# Altium PCB Flomio BLE-NFC.PcbDoc (part 2 of 2)
Units mil, origin at the board's own origin, x right, y up, seen from the top; angles counter-clockwise.
Board outline 3543.31 x 3543.31 mil, 2 copper layers (Top Layer, Bottom Layer), stack 61.2 mil thick; 153 components, 99 nets, 427 pads, 266 vias.
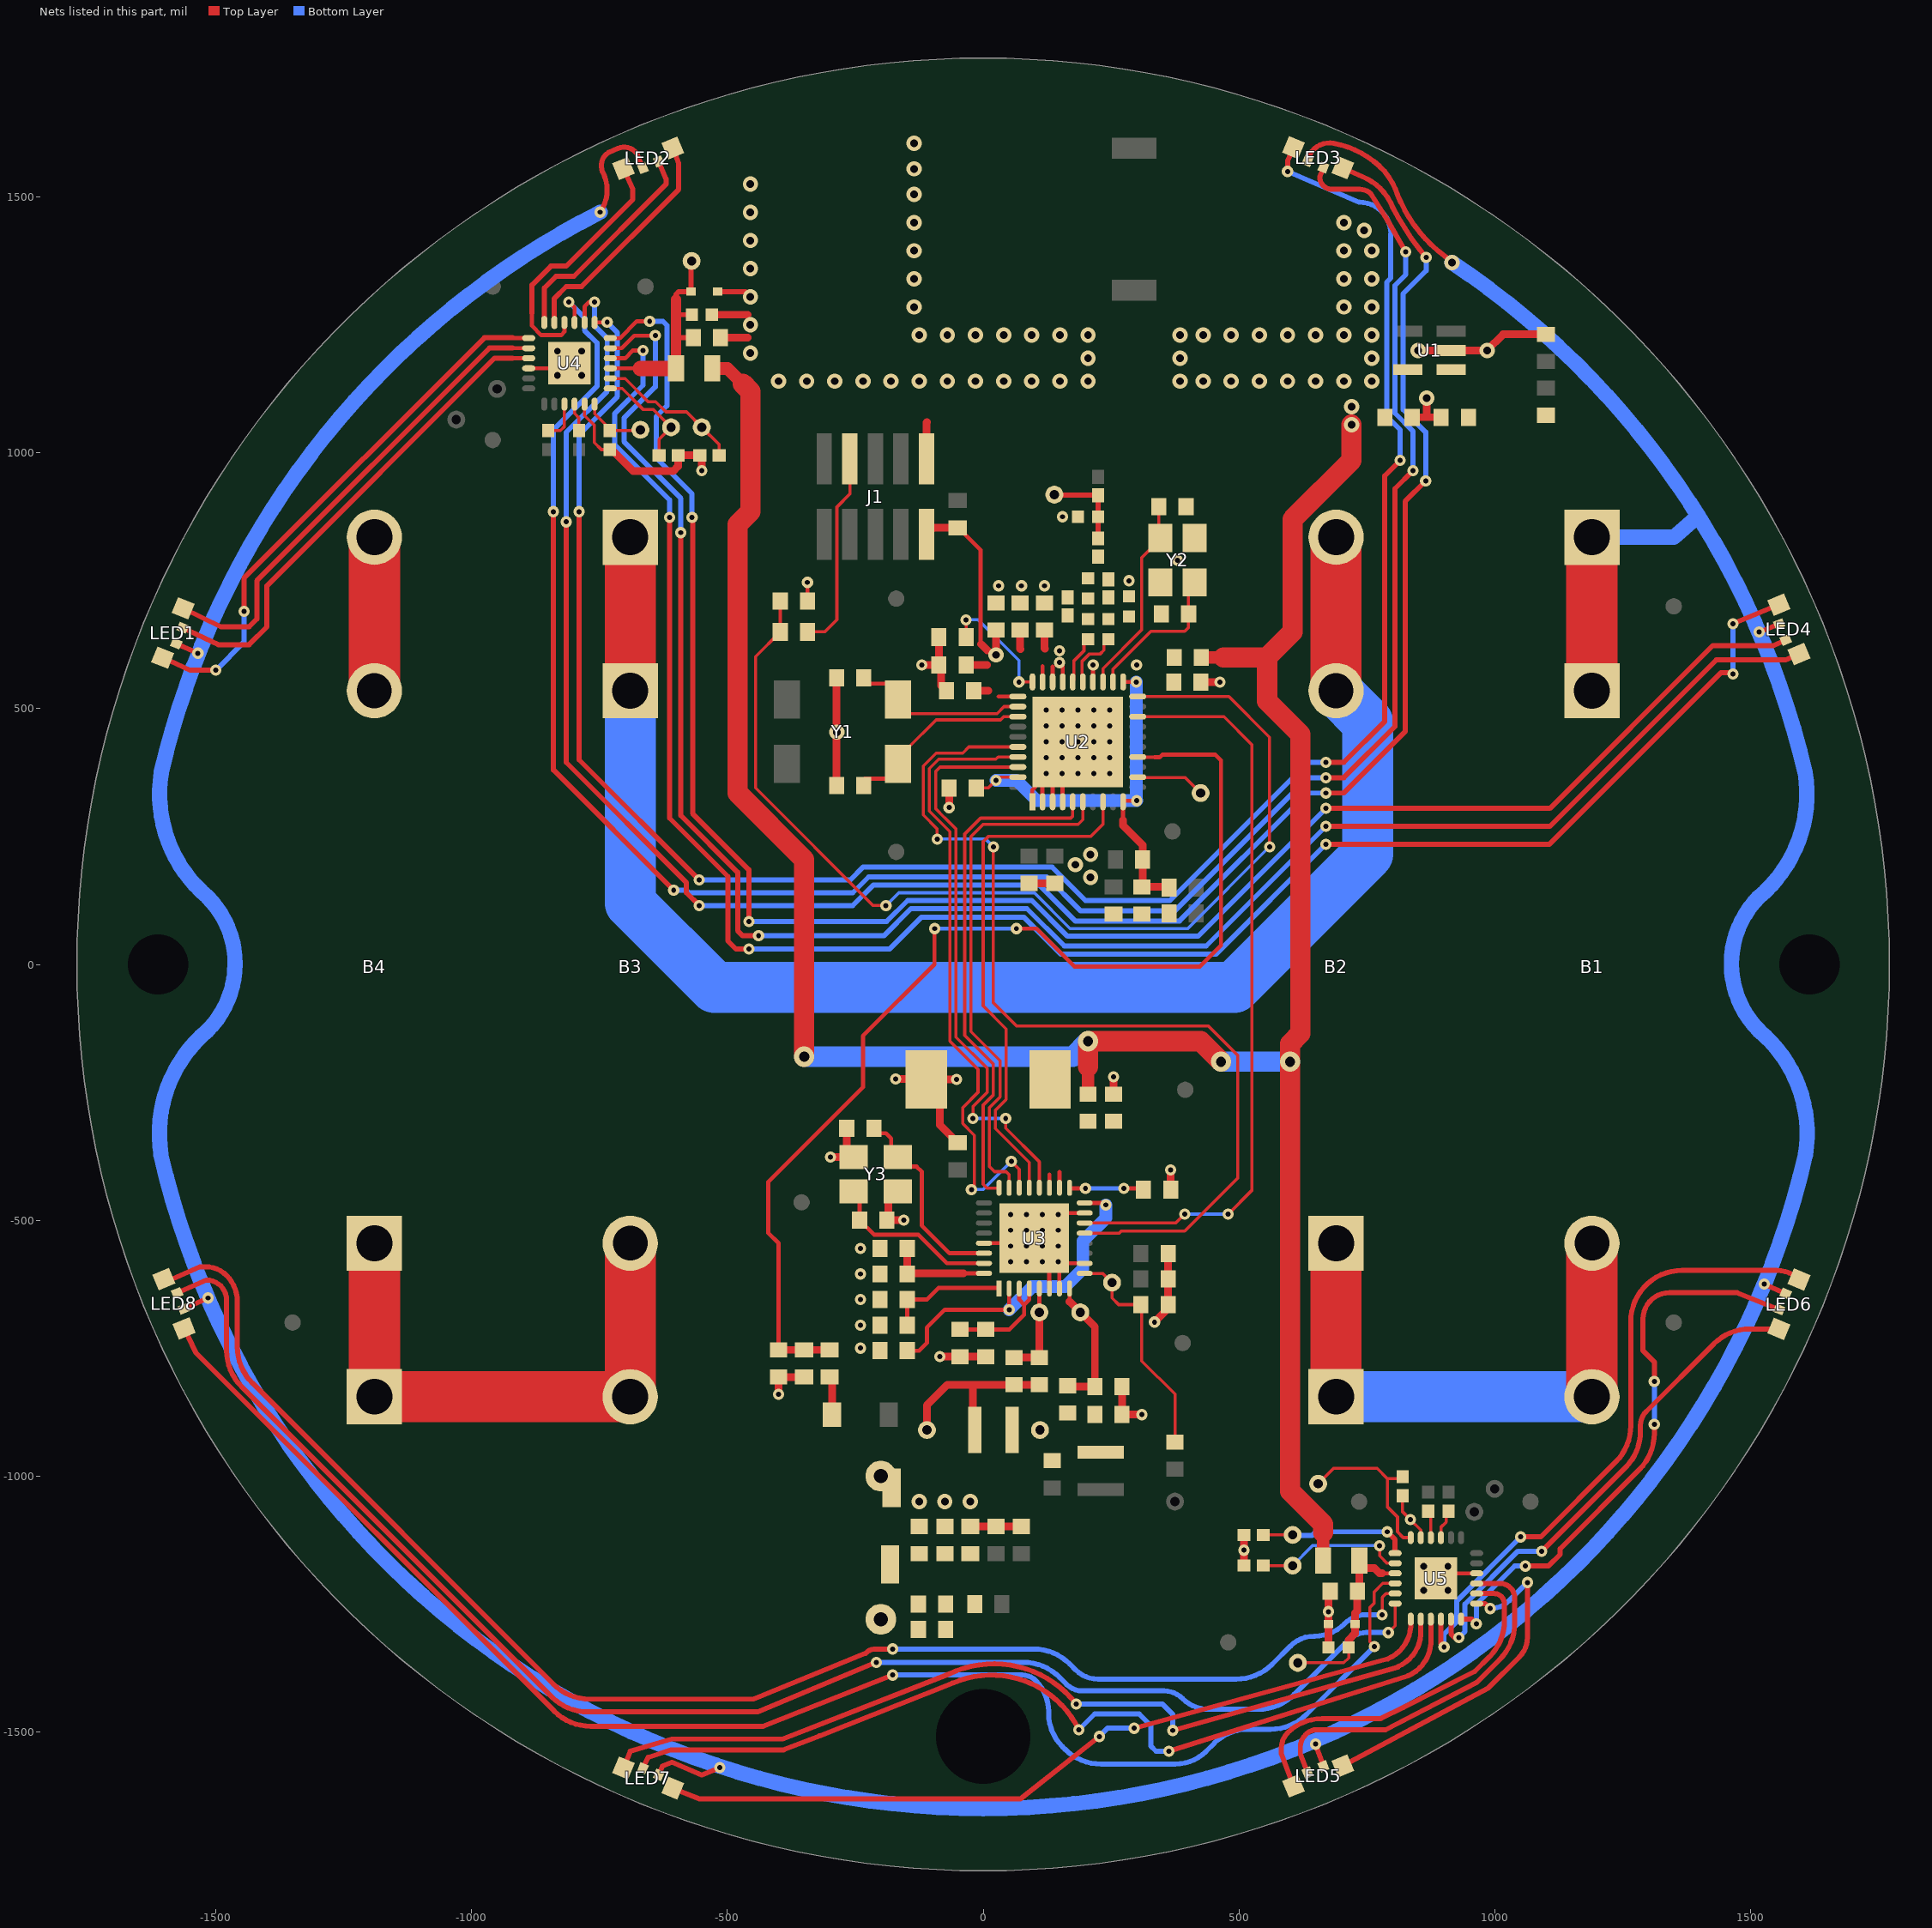
[diagram p2: the nets of this part, all layers, seen from the top]

## Via types
v1: diameter 22, hole 10, Top Layer to Bottom Layer, tented both sides, 138 vias
v2: diameter 30, hole 15, Top Layer to Bottom Layer, tented both sides, 74 vias
v3: diameter 20, hole 10, Top Layer to Bottom Layer, 41 vias
v4: diameter 25.98, hole 12.99, Top Layer to Bottom Layer, tented top, 8 vias
v5: diameter 40, hole 20, Top Layer to Bottom Layer, tented both sides, 4 vias
v6: diameter 22, hole 10, Top Layer to Bottom Layer, 1 vias

## Nets (pads, with @x,y where several pads share a name; then routed paths per layer and width w, separated by ;. In a path a pad name is that pad's centre, name@x,y a point inside that pad or via, vN(x,y) a via of type N, cw(c..) or ccw(c..) an arc to the next point about the centre after c; other vN are vias at no path point) (continued)
GND: B4.2 C1.2 C2.2 C3.2 C4.2 C5.2 C6.2 C7.2 C8.2 C9.2 C10.2 C11.2 C12.2 C13.2 C14.2 C15.2 C16.2 C17.2 C18.2 C19.2 C20.2 C21.2 C22.2 C23.2 C24.1 C25.1 C26.2 C27.2 C31.1 C32.1 C33.1 C34.1 C35.2 C36.2 C44.2 C45.2 C46.2 C47.2 C48.2 C49.2 C50.2 C51.2 C52.2 C53.2 D2.1 D3.1 E3.1 J1.1 L1.1 L7.2 R2.2 R7.2 R8.2 R10.2 R11.2 R12.2 R13.2 R15.2 R18.2 R19.2 R20.2 R23.2 R24.2 R25.2 TP22.1 U1.2 U2.1 U2.2 U2.3 U2.4 U2.41 U3.6 U3.7 U3.10 U3.15 U3.29 U3.33 U4.10 U4.17 U4.25 U5.10 U5.17 U5.25 Y2.2 Y2.4 Y3.2 Y3.4 | length 3727.9
  Top Layer w6: U4.17@-779.17,1095.28 -779.17,1073.18 -760,1054 -760,1020 -746.3,1006.3 R18.2@-720,1006.3 ; R23.2@820,-1038.7 820,-1070 v6(834.97,-1084.97) 855.47,-1105.47 U5.17@855.47,-1120.28
  Top Layer w8: U4.10@-888.43,1165.16 -818.54,1165.16 U4.25@-808.7,1175 U4.25@-779.17,1145.47 ; C26.2@-343.43,710 v1@-343.43,753.43 ; U3.29@2.33,-544.62 U3.33@32.94,-544.62 ; U2.1@96,313 96,317.46 U2.1@96.42,317.87 ; U2.1@96.19,317.65 96.19,341.19 U2.41@102,347 ; U2.2@115.88,317.65 U2.41@115.88,348.26 ; U3.6@129.3,-632.67 U3.33@129.3,-602.06 ; U2.3@135.79,317.87 U2.41@135.79,348.48 ; U3.7@148.99,-632.67 U3.33@148.99,-602.06 ; U2.4@155.25,317.65 U2.41@155.25,348.26 ; U3.33@166.83,-584.22 197.44,-584.22 U3.10@197.22,-584 ; U3.33@167.06,-486 U3.15@197.67,-486 ; U5.25@855.47,-1170.47 U5.25@885,-1200 894.84,-1190.16 U5.10@964.72,-1190.16
  Top Layer w10: D2.1@-519.02,1315 -465,1315 v2(-455,1305)
  Top Layer w15: R18.2@-726.3,1006.3 -684,964 -606,964 -596.3,973.7 R19.2@-596.3,995 R20.2@-553.7,995 -550,991.3 v1(-550,965) ; C51.2@-530.31,1270 -460,1270 ; C50.2@-513.43,1225 -460,1225 ; v1(-400,-840) C27.2@-400,-806.57 R11.2@-350,-806.57 ; v1(-298.46,-376.54) Y3.4@-253.31,-376.54 -266.57,-363.27 C35.2@-266.57,-320 ; C25.1@-286.57,350 C24.1@-286.57,560 ; v1(-171,-224) -112.06,-224 C13.2@-111.06,-225 ; Y3.2@-166.69,-443.46 -185,-461.77 -185,-496.57 C36.2@-188.43,-500 v1(-155,-500) ; v1(-120,585) C3.2@-86.57,585 ; C13.2@-111.06,-191.06 C13.2@-110,-190 ; J1.1@-110.7,987.92 -110.7,1059.3 -110,1060 ; R10.2@-86.57,640 C3.2@-86.57,585 ; v1(-85,-766.57) C21.2@5,-766.57 ; C10.2@-71.57,535 -82,545.43 -82,580.43 C3.2@-86.57,585 ; v1(-66.57,306.57) C4.2@-66.57,345 ; v1(-52.13,-225) C13.2@-111.06,-225 ; R12.2@-50,-348.43 -85,-313.43 -85,-251.06 C13.2@-111.06,-225 ; R15.2@-25,-1098.43 C46.2@25,-1098.43 C45.2@75,-1098.43 ; C12.2@90,158.43 C11.2@140,158.43 ; C15.2@255,-253.43 v1(255,-220) ; C48.2@271.57,-825 C44.2@271.57,-880 v1(310,-880) ; v1(335,-699) 361.57,-672.43 C49.2@361.57,-665 C22.2@361.57,-615 C23.2@361.57,-565 ; Y2.4@346.54,756.54 Y2.4@346.54,746.69 Y2.4@348.43,744.8 ; R13.2@366.57,-440 v1(366.57,-401.57) ; C32.1@396.57,895 C32.1@400,891.57 ; Y2.2@400,846.77 Y2.2@413.46,833.31 Y2.2@413.46,823.46 ; C6.2@425.57,552 v1(463,552) ; R25.2@510,-1175 R24.2@510,-1115 ; C53.2@675.31,-1335 D3.1@675,-1289.02 v1(675,-1265) 675,-1228.43 C52.2@678.43,-1225 ; C2.2@838.58,1069.53 867.01,1069.53 ; v2(850,1200) U1.2@915,1200 v2(985,1200) 1016.57,1231.57 R2.2@1100,1231.57 ; v2(867.01,1107.01) 867.01,1069.53 ; C1.2@895.43,1069.53 867.01,1069.53
  Top Layer w100: B4.2@-1190,535 B4.2@-1190,835
  other v1: 510,-1145 -240,-750 -240,-705 -240,-655 -240,-605 -240,-555 30,740 75,740 120,740 -343.43,746.71 285,750 380,790 155,875
  other v2: -125,-1050 -75,-1050 -25,-1050 210,170 180,195 210,215 -286,454 -400,1140 -345,1140 -290,1140 -235,1140 -180,1140 -125,1140 -70,1140 -15,1140 40,1140 95,1140 150,1140 205,1140 385,1140 430,1140 485,1140 540,1140 595,1140 650,1140 705,1140 760,1140 205,1185 385,1185 760,1185 -455,1195 -125,1230 -70,1230 -15,1230 40,1230 95,1230 150,1230 205,1230 385,1230 430,1230 485,1230 540,1230 595,1230 650,1230 705,1230 760,1230 -455,1250 -135,1285 705,1285 760,1285 -135,1340 705,1340 760,1340 -455,1360 -135,1395 705,1395 760,1395 -455,1415 745,1435 -135,1450 705,1450 -455,1470 -135,1505 -455,1525 -135,1555 -135,1605
  other v3: 53.5,-581.5 84.5,-581.5 115.5,-581.5 146.5,-581.5 53.5,-550.5 84.5,-550.5 115.5,-550.5 146.5,-550.5 53.5,-519.5 84.5,-519.5 115.5,-519.5 146.5,-519.5 53.5,-488.5 84.5,-488.5 115.5,-488.5 146.5,-488.5 123,373 154,373 185,373 216,373 247,373 123,404 154,404 185,404 216,404 247,404 123,435 154,435 185,435 216,435 247,435 123,466 154,466 185,466 216,466 247,466 123,497 154,497 185,497 216,497 247,497
  other v4: 861.38,-1223.62 908.62,-1223.62 861.38,-1176.38 908.62,-1176.38 -832.32,1151.38 -785.08,1151.38 -832.32,1198.62 -785.08,1198.62
GPIO1: U2.38 U3.20 | length 1123.9
  Top Layer w6: v1(-20,-301) -20,-278.03 8,-250.03 8,-203 -53,-142 -53,264.97 -74.6,286.57 -74.86,286.57 -93,304.72 -93,377 -84.23,385.78 U2.38@67.87,385.78 ; v1(44,-301) 44,-320 109.84,-385.84 U3.20@109.84,-437.56
  Bottom Layer w6: v1(-20,-301) v1(44,-301)
GPIO2: U2.37 U3.22 | length 1228.7
  Top Layer w6: v1(-23,-440) -17,-434 -17,-334 -40,-311 -40,-280 -10,-250 -10,-205 -65,-150 -65,259.75 -105,299.75 -105,383 -87,401 25,401 29.47,405.47 U2.37@67.87,405.47 ; v1(55,-385) 70.47,-400.47 U3.22@70.47,-437.56
  Bottom Layer w6: v1(-23,-440) 0,-440 v1(55,-385)
I/O_0: R13.1 U3.17 | length 145.1
  Top Layer w8: U3.17@168.9,-437.56 v1(200,-437.56) ; v1@275.46,-437.56 310.98,-437.56 R13.1@313.43,-440
  Bottom Layer w8: v1(200,-437.56) v1(275,-437.56)
IRQ: U2.36 U3.13 | length 1880.7
  Top Layer w6: v1(-90,245) -90,265 -117,292 -117,387.97 -91.97,413 -40,413 -27.85,425.15 U2.36@67.87,425.15 ; v1(20,230) 20,-75 65,-120 440,-120 498,-178 498,-417.03 394.03,-521 270,-521 265.85,-525.15 U3.13@197.44,-525.15
  Bottom Layer w6: v1(-90,245) 5,245 v1(20,230)
MISO: U2.6 U3.23 | length 1016.8
  Top Layer w6: U3.23@50.79,-437.56 50.79,-410.79 45,-405 22,-405 12,-395 12,-280 33,-259 33,-188 -24,-131 -24,249.94 0.06,274 185.97,274 194.84,282.87 U2.6@194.84,317.87
MOD: U2.18 U3.14 | length 1471.2
  Top Layer w6: U3.14@197.44,-505.46 376.53,-505.46 v1(394,-488) ; U2.18@302.13,484.23 470.77,484.23 525,430 525,-442 v1(479,-488)
  Bottom Layer w6: v1(394,-488) v1(479,-488)
MOSI: U2.5 U3.24 | length 1004.2
  Top Layer w6: U3.24@31.1,-437.56 7.56,-437.56 0,-430 0,-275 20,-255 20,-195 -36,-139 -36,254.91 -4.91,286 171.16,286 175.16,290 U2.5@175.16,317.87
NetB1_2: B1.2 B2.1 | length 1100
  Top Layer w100: B2.1@690,-845 B2.1@690,-545 ; B1.2@1190,-845 B1.2@1190,-545
  Bottom Layer w100: B2.1@690,-845 B1.2@1190,-845
NetB2_2: B2.2 B3.1 | length 2978.1
  Top Layer w100: B3.1@-690,535 B3.1@-690,835 ; B2.2@690,535 B2.2@690,835
  Bottom Layer w100: B3.1@-690,535 -690,120 -525,-45 491,-45 752,216 752,473 B2.2@690,535
NetB3_2: B3.2 B4.1 | length 1100
  Top Layer w100: B4.1@-1190,-545 B4.1@-1190,-845 B3.2@-690,-845 B3.2@-690,-545
NetC28_2: C28.2 C29.1 L1.2
NetC29_2: C29.2 L2.1 L4.2
NetC30_2: C30.2 C33.2 L4.1
NetC34_2: C34.2 L2.2 L3.1 TP2.1 | length 171.1
  Top Layer w10: TP2.1@139.1,918.3 140.12,917.28 L3.1@225,917.28 225,875.31 C34.2@224.69,875 224.69,833.03 L2.2@225,832.72
NetC37_1: C37.1 C42.1 C44.1 L5.2 L6.1 TP5.1
NetC38_2: C38.2 C40.2 L5.1 TP4.1 | length 374.9
  Top Layer w15: TP4.1@-110,-910 -110,-861.57 -70,-821.57 C40.2@60,-821.57 C38.2@110,-821.57 ; -20,-821.57 -20,-906.42 L5.1@-16.42,-910
NetC39_1: C39.1 C41.1 R14.2
NetC39_2: C39.2 C41.2 C47.1 E2.1 L7.1 R15.1 TP21.1
NetD1_2: D1.2 R9.1 | length 75.3
  Top Layer w15: R9.1@-300,-806.57 -295.5,-811.07 D1.2@-295.5,-880
NetJ1_7: J1.7 R6.1 | length 391.8
  Top Layer w6: R6.1@-343.43,650 -310,650 -286,674 -286,894 -260.7,919.3 J1.7@-260.7,987.92
NetR16_1: R16.1 U4.16 | length 55.2
  Top Layer w6: U4.16@-798.86,1095.28 -798.86,1076.86 -790,1068 R16.1@-790,1043.7
NetR17_1: R17.1 U4.15 | length 78.5
  Top Layer w6: R17.1@-850,1043.7 -826.3,1043.7 -818.54,1051.46 U4.15@-818.54,1095.28
NetR18_1: R18.1 TP11.1 U4.18 | length 121.4
  Top Layer w6: U4.18@-759.49,1095.28 -759.49,1076.49 -730,1047 R18.1@-730,1043.7 ; R18.1@-725,1048.7 -720,1043.7 -671.3,1043.7 TP11.1@-670,1045
NetR19_1: R19.1 TP12.1 U4.19 | length 215.2
  Top Layer w6: U4.19@-728.98,1125.79 -705.79,1125.79 -665,1085 -645,1085 TP12.1@-610,1050 -633.7,1026.3 R19.1@-633.7,995
NetR20_1: R20.1 TP13.1 U4.20 | length 287.5
  Top Layer w6: U4.20@-728.98,1145.47 -728.5,1145 -700,1145 -655,1100 -640,1100 -620,1080 -580,1080 TP13.1@-550,1050 -516.3,1016.3 R20.1@-516.3,995
NetR21_1: R21.1 U5.16 | length 53.7
  Top Layer w6: R21.1@870,-1068.7 875.16,-1073.86 U5.16@875.16,-1120.28
NetR22_1: R22.1 U5.15 | length 57.9
  Top Layer w6: U5.15@894.84,-1120.28 894.84,-1100.16 905,-1090 905,-1073.7 R22.1@910,-1068.7
NetR23_1: R23.1 TP17.1 U5.18 | length 330.1
  Top Layer w6: TP17.1@655,-1015 685,-985 770,-985 790,-1005 ; R23.1@820,-1001.3 816.3,-1005 790,-1005 ; U5.18@835.79,-1120.28 821.07,-1120.28 810,-1109.2 810,-1080 790,-1060 790,-1005
NetR24_1: R24.1 TP18.1 U5.19 | length 294
  Top Layer w6: R24.1@547.4,-1115 TP18.1@605,-1115
  Top Layer w10: v1(790,-1109) 805.28,-1124.28 U5.19@805.28,-1150.79
  Bottom Layer w10: TP18.1@605,-1115 606,-1116 643,-1116 650,-1109 v1(790,-1109)
NetR25_1: R25.1 TP19.1 U5.20 | length 300
  Top Layer w6: R25.1@547.4,-1175 TP19.1@605,-1175 ; v1(775,-1136) 775,-1156 789.47,-1170.47 U5.20@805.28,-1170.47
  Bottom Layer w6: TP19.1@605,-1175 644,-1136 v1(775,-1136)
NetTP1_1: TP1.1 U2.12 | length 135.7
  Top Layer w6: U2.12@302.13,366.09 303.21,365 395,365 TP1.1@425,335
OSC_IN: C36.1 U3.31 Y3.1 | length 340.4
  Top Layer w8: Y3.1@-253.31,-443.46 -241.57,-455.2 C36.1@-241.57,-500 -213.31,-528.27 -126.73,-528.27 -70.78,-584.22 U3.31@2.56,-584.22
OSC_OUT: C35.1 U3.30 Y3.3 | length 402
  Top Layer w8: C35.1@-213.43,-320 -213.43,-326.57 -210,-330 -190,-330 -180,-340 -180,-373.07 -176.54,-376.54 Y3.3@-166.69,-376.54 -148.23,-395 -130,-395 -120,-405 -120,-510 -65.47,-564.53 U3.30@2.56,-564.53
OUT_B01: LED1.1 U4.7 | length 1063.5
  Top Layer w8: -920,1225 -919.21,1224.21 U4.7@-888.43,1224.21
  Top Layer w10: LED1.1@-1603.76,599.61 -1550,575 v1(-1500,575) ; v1(-1445,690) -1445,755 -975,1225 -920,1225
  Bottom Layer w10: v1(-1500,575) -1445,630 v1(-1445,690)
OUT_B02: LED5.1 U5.7 | length 680.2
  Top Layer w10: LED5.1@703.19,-1566.24 987.59,-1414.18 1048.17,-1353.61 ccw(c1009.94,-1315.38) 1064,-1315.38 v1(1064,-1208) ; U5.7@964.72,-1249.21 981.21,-1249.21 v1(991,-1259)
  Bottom Layer w10: v1(991,-1259) ccw(c991,-1205.89) 1028.55,-1243.45 v1(1064,-1208)
OUT_B11: LED2.1 U4.4 | length 502.8
  Top Layer w8: -882,1273 -882,1248 -864,1230 -825,1230 -818.54,1236.46 U4.4@-818.54,1254.72
  Top Layer w10: -882,1273 -882,1328 -845,1365 -815,1365 -685,1495 -685,1515 LED2.1@-703.19,1555.87
OUT_B12: LED6.1 U5.4 | length 1253.8
  Top Layer w10: U5.4@894.84,-1279.72 894.84,-1327.84 v1(901,-1334) ; v1(1050.75,-1119) 1090,-1119 1236.71,-972.29 ccw(c1166,-901.58) 1266,-901.58 1266,-698 cw(c1366,-698) 1366,-598 1551.69,-598 cw(c1551.69,-659.47) LED6.1@1595.16,-616.01
  Bottom Layer w10: v1(901,-1334) 901,-1309 926,-1284 926,-1243.75 v1(1050.75,-1119)
OUT_B21: LED3.1 U4.1 | length 4052
  Top Layer w8: U4.1@-759.49,1254.72 -735.28,1254.72 v1(-735,1255)
  Top Layer w10: v1(-790,885) -790,400 v1(-555,165) ; v1(595,1550) 595,1570 LED3.1@606.81,1596.73 ; v1(670,395) 705,395 785,475 785,955 v1(815,985)
  Bottom Layer w10: v1(-790,885) -790,1035 -715,1110 -715,1235 v1(-735,1255) ; v1(-555,165) -260,165 -235,190 135,190 200,125 365,125 635,395 v1(670,395) ; v1(595,1550) 735,1490 cw(c735,1428) 797,1428 797,1341.63 789,1333.63 789,1071 815,1045 v1(815,985)
OUT_B22: LED7.1 U5.1 | length 1565.2
  Top Layer w10: LED7.1@-606.81,-1610.2 -555,-1631 73,-1631 v1(227,-1509) ; v1(295,-1493) 791.15,-1357.3 ccw(c762.29,-1289.5) 835.79,-1294.79 U5.1@835.79,-1279.72
  Bottom Layer w10: v1(227,-1509) 243,-1493 v1(295,-1493)
OUT_B31: LED4.1 U4.22 | length 3801.7
  Top Layer w8: U4.22@-728.98,1184.84 -700.16,1184.84 -685,1200 v1(-665,1200)
  Top Layer w10: v1(-613,874) -613,286 -499,172 -499,46 -483,30 v1(-458,30) ; v1(670,235) 1107,235 1442,570 1470,570 1467.78,567.78 v1(1466,567.78) ; v1(1466,666) LED4.1@1555.27,703.19
  Bottom Layer w10: v1(-665,1200) -665,1132 -720,1077 -720,1015 -613,908 v1(-613,874) ; v1(-458,30) -183,30 -121,92 80,92 152,20 455,20 v1(670,235) ; v1(1466,567.78) 1467.78,567.78 1470,570 1466,574 v1(1466,666)
OUT_B32: LED8.1 U5.22 | length 3022.5
  Top Layer w6: v1(765,-1333) 756,-1324 756,-1257 764,-1249 764,-1227 781.16,-1209.84 U5.22@805.28,-1209.84
  Top Layer w10: LED8.1@-1561.8,-711.2 -1539,-759 -838.29,-1459.71 ccw(c-767.58,-1389) -767.58,-1489 -430,-1489 v1(-177,-1389)
  Bottom Layer w10: v1(-177,-1389) 76.44,-1389 cw(c76.44,-1426.56) 103,-1400 cw(c42.64,-1460.36) 128,-1460.36 128,-1464 ccw(c219.74,-1464) 154.87,-1528.87 159.71,-1533.71 ccw(c230.42,-1463) 230.42,-1563 375.64,-1563 ccw(c375.64,-1477.64) 436,-1538 452.13,-1521.87 cw(c517,-1586.74) 517,-1495 561.58,-1495 ccw(c561.58,-1395) 632.29,-1465.71 v1(765,-1333)
OUT_G01: LED1.4 U4.8 | length 953.6
  Top Layer w8: -920,1205 -919.53,1204.53 U4.8@-888.43,1204.53
  Top Layer w10: LED1.4@-1563.84,695.99 -1490,660 -1435,660 -1420,675 -1420,750 -965,1205 -920,1205
OUT_G02: LED5.4 U5.8 | length 725.1
  Top Layer w10: LED5.4@606.81,-1606.16 583,-1543 583,-1531.42 cw(c625.06,-1531.42) 595.32,-1501.68 cw(c662.15,-1568.51) 662.15,-1474 777,-1474 822,-1452 961,-1382 989.71,-1353.29 ccw(c919,-1282.58) 1019,-1282.58 1019,-1250.07 ccw(c998.46,-1250.07) 998.46,-1229.53 U5.8@964.72,-1229.53 U5.8@964.72,-1229
OUT_G11: LED2.4 U4.5 | length 461.6
  Top Layer w10: U4.5@-838.23,1254.72 -838.23,1301.77 -815,1325 -785,1325 -595,1515 -595,1565 LED2.4@-606.81,1595.8
OUT_G12: LED6.4 U5.5 | length 984.2
  Top Layer w10: U5.5@914.53,-1279.72 914.53,-1308.53 922,-1316 v1(930,-1316) ; v1(1092,-1147) 1255.71,-983.29 ccw(c1185,-912.58) 1285,-912.58 1285,-901 cw(c1323.63,-901) 1296.31,-873.69 1428.32,-741.68 cw(c1499.03,-812.39) 1499.03,-712.39 LED6.4@1555.24,-712.39
  Bottom Layer w10: v1(930,-1316) 942,-1304 942,-1250.37 1045.37,-1147 v1(1092,-1147)
OUT_G21: LED3.4 U4.2 | length 4190.6
  Top Layer w8: U4.2@-779.17,1254.72 -779.17,1285.83 -770,1295 v1(-760,1295)
  Top Layer w10: v1(-815,865) -815,395 -580,160 -580,140 v1(-555,115) ; v1(670,335) 705,335 825,455 825,905 v1(865,945) ; LED3.4@703.19,1556.8 741,1540 cw(c700.5,1440.5) 800.35,1480.14 ccw(c1294.84,1738.76) v1(865.86,1381.84)
  Bottom Layer w10: v1(-815,865) -815,1040 -735,1120 -735,1223.89 -760,1248.89 v1(-760,1295) ; v1(-555,115) -255,115 -215,155 110,155 180,85 383.89,85 633.89,335 v1(670,335) ; v1(865,945) 865,1040.25 821,1084.25 821,1311 865.86,1355.86 v1(865.86,1381.84)
OUT_G22: LED7.4 U5.2 | length 1758.8
  Top Layer w10: LED7.4@-703.19,-1570.27 -690,-1538 -609,-1514 -391.86,-1514 -67,-1387 cw(c21,-1571) v1(182.05,-1445.85) ; v1(370.91,-1497.25) 811.08,-1373.38 ; 810.83,-1372.51 ccw(c781.97,-1304.71) 855.47,-1310 U5.2@855.47,-1279.72
  Bottom Layer w10: v1(182.05,-1445.85) 350.85,-1445.85 370.91,-1465.91 v1(370.91,-1497.25)
OUT_G31: LED4.4 U4.23 | length 3743.9
  Top Layer w8: U4.23@-728.98,1204.53 -706.47,1204.53 -682,1229 v1(-641,1229)
  Top Layer w10: v1(-591,844) -591,291 -480,180 -480,66 -470,56 v1(-439,56) ; v1(670,270) 1108,270 1433,595 1568,595 LED4.4@1595.2,606.8
  Bottom Layer w10: v1(-641,1229) -641,1129 -702,1068 -702,1022 -591,911 v1(-591,844) ; v1(-439,56) -194,56 -141,109 85.63,109 158.63,36 436,36 v1(670,270)
OUT_G32: LED8.4 U5.23 | length 2956.3
  Top Layer w6: v1(780,-1271) 780,-1237 787.47,-1229.53 U5.23@805.28,-1229.53
  Top Layer w10: LED8.4@-1601.73,-614.81 -1592.99,-618.22 -1531,-591 -1520.04,-591 cw(c-1520.04,-649.04) -1479,-608 cw(c-1529.7,-658.7) -1458,-658.7 -1458,-747.58 ccw(c-1358,-747.58) -1428.71,-818.29 -840.29,-1406.71 ccw(c-769.58,-1336) -769.58,-1436 -449,-1436 -230,-1346.46 cw(c-209.58,-1366.88) -209.58,-1338 v1(-177,-1338)
  Bottom Layer w10: v1(-177,-1338) 98.58,-1338 cw(c98.58,-1438) 169.29,-1367.29 181,-1379 ccw(c224.46,-1335.54) 224.46,-1397 494.58,-1397 ccw(c494.58,-1297) 565.29,-1367.71 600.91,-1332.09 cw(c647,-1378.18) 647,-1313 648.06,-1313 ccw(c648.06,-1231.06) 706,-1289 cw(c749.46,-1332.46) 749.46,-1271 v1(780,-1271)
OUT_R01: LED1.3 U4.9 | length 962.5
  Top Layer w8: -920,1185 -919.84,1184.84 U4.9@-888.43,1184.84
  Top Layer w10: LED1.3@-1564.67,657.99 -1495,625 -1435,625 -1400,660 -1400,710 -1400,740 -955,1185 -920,1185
OUT_R02: LED5.3 U5.9 | length 721.9
  Top Layer w10: LED5.3@634.27,-1579.87 620.1,-1543.57 620.1,-1529.9 cw(c653.9,-1529.9) 630,-1506 632.22,-1503.78 cw(c651,-1522.56) 651,-1496 786.67,-1496 965.08,-1403.23 1009.71,-1358.6 ccw(c939,-1287.89) 1039,-1287.89 1039,-1238 ccw(c1011,-1238) 1011,-1210 964.72,-1210 U5.9@964.72,-1209.84
OUT_R11: LED2.3 U4.6 | length 436.7
  Top Layer w10: U4.6@-857.91,1254.72 -857.91,1322.09 -835,1345 -800,1345 -620,1525 -620,1535 LED2.3@-634.27,1569.51
OUT_R12: LED6.3 U5.6 | length 1118.9
  Top Layer w10: U5.6@934.21,-1279.72 954.72,-1279.72 v1(964,-1289) ; v1(1060,-1176) 1105,-1176 1128,-1153 1128,-1142 1282.71,-987.29 ccw(c1212,-916.58) 1312,-916.58 v1(1312,-899) ; v1(1312,-815) 1312,-777 1290,-755 1290,-693 cw(c1341.37,-693) 1341.37,-641.63 1473.94,-641.63 LED6.3@1556.07,-674.39
  Bottom Layer w10: v1(964,-1289) 964,-1251 1039,-1176 v1(1060,-1176) ; v1(1312,-899) v1(1312,-815)
OUT_R21: LED3.3 U4.3 | length 4185.3
  Top Layer w8: v1(-810,1295) -798.86,1283.86 U4.3@-798.86,1254.72
  Top Layer w10: v1(-840,885) -840,380 v1(-605,145) ; LED3.3@665.19,1557.63 658,1539 ccw(c682,1539) 682,1515 736.27,1515 cw(c736.27,1484.27) 758,1506 786.03,1462 v1(826,1393) ; v1(670,365) 705,365 805,465 805,930 v1(840,965)
  Bottom Layer w10: v1(-840,885) -840,1045 -755,1130 -755,1215 -779.17,1239.17 -779.17,1264.17 v1(-810,1295) ; v1(-605,145) -580,145 -575,140 -255,140 -224,171 124,171 190,105 375,105 635,365 v1(670,365) ; v1(826,1393) 826,1348 805,1327 805,1077.63 840,1042.63 v1(840,965)
OUT_R22: LED7.3 U5.3 | length 1798.3
  Top Layer w10: LED7.3@-665.19,-1571.1 -655,-1550 -610,-1535 -390.18,-1535 -390,-1535.18 -320,-1508 -60.07,-1404.93 cw(c16.18,-1578.81) v1(187.02,-1495.99) ; v1(363,-1538) 830.36,-1390.51 ccw(c801.5,-1322.71) 875,-1328 ; 875.16,-1328 U5.3@875.16,-1279.72
  Bottom Layer w10: v1(187.02,-1495.99) 218.01,-1465 305,-1465 327.5,-1487.5 327.5,-1527.5 338,-1538 v1(363,-1538)
OUT_R31: LED4.3 U4.24 | length 3687
  Top Layer w8: U4.24@-728.76,1224 -710,1224 -677,1257 v1(-652,1257)
  Top Layer w10: v1(-569,874) -568,873 -568,295 -458,185 v1(-458,84) ; v1(670,305) 1108,305 1426,623 1544,623 LED4.3@1568.91,634.26
  Bottom Layer w10: v1(-652,1257) -626,1257 -618,1249 -618,1092 -639,1071 -639,990 -569,920 v1(-569,874) ; v1(-458,84) -188.63,84 -147.63,125 95,125 165,55 420,55 v1(670,305)
OUT_R32: LED8.3 U5.24 | length 2965.9
  Top Layer w6: v1(792,-1306) 805.28,-1292.72 U5.24@805.28,-1249.21
  Top Layer w10: LED8.3@-1575.44,-642.27 -1518,-617 cw(c-1518,-656) -1479,-656 -1479,-754.58 ccw(c-1379,-754.58) -1449.71,-825.29 -843.29,-1431.71 ccw(c-772.58,-1361) -772.58,-1461 -441,-1461 v1(-209,-1364)
  Bottom Layer w10: v1(-209,-1364) 78.58,-1364 cw(c78.58,-1464) 149.29,-1393.29 163,-1407 ccw(c194.38,-1375.62) 194.38,-1420 353.79,-1420 cw(c353.79,-1471.21) 390,-1435 ccw(c440.7,-1384.3) 440.7,-1456 537.58,-1456 ccw(c537.58,-1356) 608.29,-1426.71 714.68,-1320.31 cw(c749.24,-1354.87) 749.24,-1306 v1(792,-1306)
R_BIAS: R10.1 U2.30 | length 238
  Top Layer w6: R10.1@-33.43,640 v1(-33.43,673.43) ; v1(70,552.13) U2.30@96.42,552.13
  Bottom Layer w6: v1(-33.43,673.43) -9.48,673.43 70,593.94 v1(70,552.13)
RF_N: C28.1 U2.26 | length 95.3
  Top Layer w6: U2.26@175.16,552.13 ccw(c170.71,556.57) 177,556.57 177,593 197,613 197,627.32 C28.1@205,635.32
RF_P: C30.1 U2.25 | length 117.5
  Top Layer w6: U2.25@194.84,552.13 cw(c199.29,556.57) 193,556.57 193,592 208,607 229,607 236,614 236,626.32 C30.1@245,635.32
RSTN: C26.1 R6.2 U2.20 | length 2095.8
  Top Layer w6: C26.1@-396.57,710 R6.2@-396.57,650 -445,601.57 -445,345 -215,115 v1(-190,115) ; U2.20@302.13,523.61 480.39,523.61 560,444 v1(560,230)
  Bottom Layer w6: v1(-190,115) -165,140 100,140 170,70 400,70 v1(560,230)
RX_IN1: C42.2 C48.1 TP7.1 U3.8 | length 269.1
  Top Layer w8: 168.9,-658.9 U3.8@168.9,-633.43 U3.8@168.9,-632.44
  Top Layer w15: C42.2@168.9,-819.53 C42.2@165,-823.43 166.57,-825 C48.1@218.43,-825 218.43,-708.43 TP7.1@195,-685 ; 168.9,-658.9 TP7.1@190,-680 TP7.1@192.5,-682.5
RX_IN2: C43.2 C49.1 TP8.1 U3.9 | length 449.9
  Top Layer w6: U3.9@197.44,-603.91 233.91,-603.91 TP8.1@251.96,-621.96 251.96,-651.96 265,-665 C49.1@308.43,-665 310,-666.57 310,-775 375,-840 C43.2@375,-933.43
SLAVE_SELECT: U2.8 U3.21 | length 1024.3
  Top Layer w6: U3.21@90.16,-437.56 90.16,-387.16 24,-321 24,-285 45,-264 45,-126 0,-81 0,240 10,250 210,250 234.21,274.21 U2.8@234.21,317.87
SNIF: C27.1 R9.2 R11.1 U2.14 | length 2205.7
  Top Layer w6: U2.14@302.13,405.47 302.59,405 335,405
  Top Layer w8: C27.1@-400,-753.43 -400,-545 -420,-525 -420,-425 -235,-240 -235,-140 -95,0 v1(-95,70) ; v1(65,70) 104,70 178,-4 424,-4 465,37 465,399 454,410 350,410 345,405 335,405
  Top Layer w15: C27.1@-400,-753.43 R11.1@-350,-753.43 R9.2@-300,-753.43
  Bottom Layer w8: v1(-95,70) v1(65,70)
TX_OUT: C38.1 C40.1 TP3.1 U3.5 | length 186
  Top Layer w8: TP3.1@109.84,-669.84 U3.5@109.84,-633.43 U3.5@109.84,-632.44
  Top Layer w15: C40.1@60,-768.43 C38.1@110,-768.43 110,-680.16 109.84,-680 TP3.1@109.84,-669.84
VBAT: B1.1 C1.1 LED1.2 LED2.2 LED3.2 LED4.2 LED5.2 LED6.2 LED7.2 LED8.2 R1.1 U1.1 | length 10296.7
  Top Layer w10: LED1.2@-1577.47,627.07 v1(-1535,608.27) ; LED8.2@-1562.63,-673.19 v1(-1515,-651.95) ; v1@-748.75,1470.55 ccw(c-809.88,1513.6) -744.27,1549.48 cw(c-716,1561) -732,1587 -713.52,1595.27 cw(c-702,1567) -676,1583 LED2.2@-665.19,1556.7 ; LED7.2@-634.27,-1583.91 -627.05,-1566.89 -608.53,-1559.41 -550.12,-1584.19 v1(-515,-1570) ; LED3.2@634.27,1570.44 cw(c676.92,1562.35) 685,1605 cw(c652.5,1427.5) 784.82,1550.2 cw(c662.31,1452.51) 809.95,1504.98 ccw(c1064.97,1605.02) v2@917.67,1374.06 ; v1(649.74,-1524) LED5.2@665.19,-1567.07 ; v1(1517.1,649.71) LED4.2@1556.1,665.18 ; v1(1527.21,-625) LED6.2@1568.87,-643.47
  Top Layer w100: B1.1@1190,535 B1.1@1190,835
  Bottom Layer w30: -1607.47,-372.19 ccw(c0,0) 1607.49,-372.11 ccw(c1348.45,-330.63) 1517.23,-129.79 cw(c1647.86,1.35) 1516.72,131.98 ccw(c1347.94,332.82) 1606.99,374.3 ccw(c0,0) v2(916.42,1372.1) ; -1607.1,-372.11 cw(c-1348.05,-330.63) -1516.83,-129.79 ccw(c-1647.46,1.35) -1516.32,131.98 cw(c-1347.54,332.82) -1606.59,374.3 ; -1606.86,374.82 cw(c0,0) v1(-748.57,1470.42) ; B1.1@1190,835 1350,835 1397.57,877.09
VCC: C2.1 FB1.1 FB2.1 L8.1 L9.1 U1.5 | length 5018.6
  Top Layer w25: L8.1@-529.57,1165 -500,1165 -470,1135 ; FB2.1@205,-253.43 205,-200 ; FB1.1@426.57,600 470,600 ; L9.1@664.57,-1165 664.57,-1110.43
  Top Layer w40: -470,1135 -455,1120 -455,885 -480,860 -480,335 -350,205 v5(-350,-180) ; 205,-200 v5(205,-150) 425,-150 v5(465,-190) ; 470,600 555,600 ; 664.57,-1110.43 664.57,-1094.57 600,-1030 v5(600,-190) 600,-155 620,-135 620,450 555,515 555,600 ; v2(720,1055) 720,985 605,870 605,650 555,600
  Bottom Layer w40: v5(-350,-180) 175,-180 v5(205,-150) ; v5(465,-190) v5(600,-190)
  other v2: 720,1090
VCCBLE: C3.1 C4.1 C5.1 C6.1 C7.1 C8.1 C9.1 C10.1 FB1.2 J1.2 R3.1 R4.1 R5.1 U2.10 U2.21 U2.24 U2.27 U2.28 U2.29 U2.31 U2.39 | length 1595.7
  Top Layer w6: C10.1@-18.43,535 C10.1@-7.03,523.61 ; C4.1@-13.43,345 10,345 v1(25,360) 31.09,366.09 U2.39@67.87,366.09
  Top Layer w8: R5.1@-50,853.43 -48.43,853.43 -5,810 -5,626 ; 30,523.61 U2.31@67.87,523.61 ; U2.29@116.1,552.13 116.1,582.9 ; U2.28@135.79,552.13 135.79,582.21 ; U2.27@155.47,552.13 v1@155.47,584.53 ; U2.24@214.53,552.13 214.53,584.53 v1(215,585) ; 273.58,281.42 U2.10@273.58,317.87 275.71,320 v1(300,320) ; U2.21@273.58,552.13 v1(299.13,552.13)
  Top Layer w15: J1.2@-110.7,840.68 -97.95,853.43 R5.1@-50,853.43 ; C3.1@-33.43,585 8,585 ; C10.1@-18.43,535 10,535 ; -3.87,626 8.13,614 ; v2@25,616 C8.1@25,653.43 ; C9.1@72,653.43 72,617 73,616 ; C7.1@120,653.43 120,618 121,617 ; 273.58,281.42 273.58,271.42 311.57,233.43 R4.1@311.57,205 311.57,153.15 C5.1@310,151.57 361.85,151.57 R3.1@363.43,150 ; v1(299.13,552.13) v1@299.25,552
  Bottom Layer w25: v1(25,360) 65,360 105,320 v1@299.13,320 ; v1(299.13,552.13) v1@299.13,320 ; v1(300,320) v1@299.13,320
  other v1: 299.87,585.13 149,590 149,613
  other v2: 25,605
VCCNFC: C13.1 C14.1 C15.1 FB2.2 U3.2 U3.16 U3.18 U3.19 | length 708.8
  Top Layer w8: C14.1@-148.43,-755 -125,-755 -110,-740 -110,-710 -75,-675 v1(50.79,-675) U3.2@50.79,-633.43 U3.2@50.79,-632.44 ; U3.19@129.53,-437.56 129.53,-410.47 ; U3.18@149.21,-437.56 149.21,-405.79 ; U3.16@197.44,-466.09 v1@233.91,-466.09
  Bottom Layer w25: v1(50.79,-675) 95.79,-630 160,-630 195,-595 195,-540.46 240,-495.46 v1(240,-470)
VDD_A: C16.1 C17.1 U3.1 | length 238.9
  Top Layer w8: C16.1@-148.43,-705 C17.1@-148.43,-655 -110,-655 -87.44,-632.44 U3.1@31.1,-632.44
VDD_LED_DRV1: C50.1 C51.1 D2.2 L8.2 TP9.1 U4.21 | length 429.9
  Top Layer w8: U4.21@-728.98,1165.16 -728.82,1165 -670,1165
  Top Layer w10: -600.43,1225 C50.1@-566.57,1225 ; -600.43,1270 C51.1@-569.69,1270 ; -600.43,1299.57 -600.43,1309.57 -595,1315 D2.2@-570.98,1315 -570.98,1374.02 TP9.1@-570,1375
  Top Layer w20: L8.2@-600.43,1165 -600.43,1225 -600.43,1270 -600.43,1299.57
  Top Layer w30: -670,1165 L8.2@-600.43,1165
VDD_LED_DRV2: C52.1 C53.1 D3.2 L9.2 TP15.1 U5.21 | length 376.8
  Top Layer w6: TP15.1@615,-1365 705,-1365 714.68,-1355.31 C53.1@714.68,-1335
  Top Layer w8: 780.16,-1190.16 U5.21@805.28,-1190.16
  Top Layer w15: C53.1@714.68,-1335 714.68,-1320.31 726.97,-1308.03 D3.2@726.97,-1289.02 726.97,-1268.03 731.57,-1263.43 C52.1@731.57,-1225 735.43,-1221.14 L9.2@735.43,-1179.57 ; L9.2@735.43,-1165 L9.2@735.43,-1179.57 ; 780.16,-1190.16 775.16,-1190.16 765,-1180 735.87,-1180 L9.2@735.43,-1179.57
VDD_RF: C20.1 C21.1 U3.3 U3.4 | length 228.2
  Top Layer w8: C20.1@-45,-713.43 C21.1@5,-713.43 51.57,-713.43 80,-685 80,-665 ; U3.3@70.47,-633.43 70.47,-655.47 80,-665 ; U3.4@90.16,-633.43 90.16,-655 90,-655 80,-665
VDD_X: C18.1 C19.1 U3.32 | length 201.4
  Top Layer w8: -38.91,-603.91 U3.32@2.56,-603.91
  Top Layer w15: C18.1@-148.43,-555 C19.1@-148.43,-605 -147.34,-603.91 -38.91,-603.91
XOSC32K_Q1: C24.2 U2.32 Y1.1 | length 373.4
  Top Layer w6: Y1.1@-168,490 -133,490 27,490 40.91,503.91 U2.32@67.87,503.91
  Top Layer w8: C24.2@-233.43,560 -222.43,549 -166,549 -166.73,548.27 Y1.1@-166.73,517.99 -166.73,491.27 Y1.1@-168,490
XOSC32K_Q2: C25.2 U2.33 Y1.4 | length 398.5
  Top Layer w6: Y1.4@-166.73,392.01 -166.73,418.27 -163,422 -148,422 -92,478 34,478 40.22,484.23 U2.33@67.87,484.23
  Top Layer w8: C25.2@-233.43,350 -233.43,361.57 -232,363 -165,363 -166.73,364.73 Y1.4@-166.73,392.01
XOSC_Q1: C31.2 U2.22 Y2.1 | length 299.3
  Top Layer w6: U2.22@253.9,552.13 253.9,576.9 328,651 394,651 401.57,658.57 C31.2@401.57,685 401.57,734.8 Y2.1@413.46,746.69
XOSC_Q2: C32.2 U2.23 Y2.3 | length 390.7
  Top Layer w6: U2.23@234.21,552.13 234.21,578.21 310,654 310,795 346.54,831.54 343.43,834.65 C32.2@343.43,895
pads on no net: E1.2 FID1. FID2. FID3. FID4. FID5. FID6. FID7. FID8. FID9. FID10. FID11. FID12. FID13. FID14. FID15. J1.5 J1.6 J1.8 J1.9 J1.10 U1.3 U1.4 U3.27 U4.13 U4.14 U5.13 U5.14 Y1.2 Y1.3

## Polygon pours and split planes (outlines as drawn)
GND on Top Layer "Antenna GND" (solid, remove dead copper, pour order 6): -470.02,1190.02 -469.64,1564.02 cw(c0.93,-145.32) 778.46,1448.02 780,1120 685,1120 685,615 10,615 10,825 -20,855 -20,935 -85,935 -85,1050 -330,1050
VBAT on Top Layer "VBAT" (solid, remove dead copper, pour order 8): 895,1150 895,1175 1015,1175 1055,1135 1055,1105 1070,1090 1090,1090 1255,925 1255,765 1100,765 1100,870 935,1035 935,1110
GND on Bottom Layer "Bottom_GND" (solid, remove dead copper, pour order 4): -1622.06,-15.9 ccw(c12.15,-15.9) 12.15,-1650.11 ccw(c12.15,-15.9) 1646.35,-15.9 ccw(c12.15,-15.9) 12.15,1618.3 ccw(c12.15,-15.9)

## Keep-outs
Keep-Out Layer:
  the board outline again, w15

## Other copper
Top Layer:
  rectangle net GND: -260,-775 -190,-540
  rectangle net GND: -167,-1105 -10,-1035
  region net GND: 375,110 235,110 225,120 225,225 215,235 175,235 165,225 165,180 135,180 135,70 160,45 375,45
  region net VCCBLE: 382,613 312,613 288,589 288,546 293,541 382,541
  region net NetC28_2: 215,720 215,670 155,670 155,695 190,695 195,700 195,720
  region net NetC30_2: 255,720 255,705 270,690 295,690 295,665 235,665 235,720
  region net NetC29_2: 195,745 195,795 205,805 245,805 255,795 255,745
  region net VCC: 850,1175 850,1130 805,1085 805,1040 700,1040 700,1110 780,1110 795,1125 795,1175
  region net BLE_ANT: 238,1335 353,1335 353,1024 269,940 185,940 166,959 166,1000 238,1072
  region net VCCBLE: 4,624 157,624 162,619 162,579 55,579 41,565 41,513 4,513
  region net VCCNFC: 100,-255 100,-335 125,-360 125,-415 155,-415 155,-400 175,-380 205,-380 225,-400 225,-470 255,-470 255,-380 280,-355 280,-305 165,-305 165,-255
  region net GND: 15,715 170,715 170,755 15,755
  region net NetC37_1: 65,-865 235,-865 235,-910 245,-920 275,-920 275,-965 175,-965 160,-980 65,-980
  region net ANT_MON: 270,-1010 270,-1125 125,-1270 25.31,-1270 25,-1269.68 25,-1210 10,-1195 10,-1145 105,-1145 110,-1140 110,-1010
  region net NetC39_1: -85,-1235 -5,-1235 -5,-1295 -25,-1315 -85,-1315
  region net NetC39_2: -195,-1135 -10,-1135 -10,-1195 -20,-1205 -95,-1205 -110,-1220 -110,-1315 -195,-1315
  pour cut-out: -115,1259.84 -115,1768.8 -98.43,1768.8 cw(c-0.13,-1.08) 688.98,1632.1 688.98,1259.84
  text ".VersionControl_RevNumber" at 1698,177 h60 r90
Bottom Layer:
  region net VCCBLE: 217.43,556.57 233,541 309,541 318,550 318,587 305,600 191,600 168,623 140,623 135,618 135,578 156.43,556.57
  pour cut-out: -115,1259.84 -115,1768.8 -98.43,1768.8 cw(c-0.13,-1.08) 688.98,1632.1 688.98,1259.84

## Silkscreen, mask and mechanical layers (free items; w line width, h text height)
Top Overlay:
  drawing of 128 lines, arcs and shapes, not listed
  text "No Ground" at 393.7,1397.64 h30
Bottom Overlay:
  drawing of 16 lines, arcs and shapes, not listed
  text "E3" at -230,-1070 h30
  text "E2" at -230,-1240 h30
Top Solder:
  rectangle: -144,-1375 -110,-1338
Board Outline:
  the board outline again, w5
Mechanical 3:
  lines w2: 688.98,1259.84 688.98,1632.1 ccw(c-0.13,-1.08) -98.43,1768.8 -98.43,1259.84 688.98,1259.84 ; 688.98,1259.84 688.98,1259.84
TitleBlock:
  drawing of 55 lines, arcs and shapes, not listed
  text "1" at -4147.46,4129.8 h70
  text "2" at -1396.8,4129.8 h70
  text "3" at 1348.2,4129.8 h70
  text "4" at 4099.21,4129.8 h70
  text "A" at -5423.8,3111.8 h70
  text "A" at 5376.2,3111.8 h70
  text "B" at -5423.8,986.8 h70
  text "B" at 5376.2,986.8 h70
  text "C" at -5423.8,-1138.2 h70
  text "C" at 5376.2,-1138.2 h70
  text "ENGINEER:" at 851.2,-2935.2 h45
  text "TITLE:" at 2351.2,-2935.2 h45
  text "Gregg Connary" at 901.2,-3060.2 h70
  text "Flomio" at 2421.2,-3090.2 h100
  text "PCB DESIGNER:" at 851.2,-3230.2 h45
  text "Flojack BLE-NFC Rev 2" at 2421.2,-3255.2 h100
  text "D" at -5423.8,-3258.2 h70
  text "D" at 5376.2,-3258.2 h70
  text "Gregg Connary" at 901.2,-3360.2 h70
  text "DATE:" at 851.2,-3535.2 h45
  text "PART NO.:" at 2351.2,-3535.2 h45
  text "REV:" at 4451.2,-3535.2 h45
  text "Anidea Engineering, Inc." at -448.8,-3635.2 h70
  text ".PRINT_DATE" at 901.2,-3655.2 h70
  text "PART NUMBER" at 2421.2,-3655.2 h70
  text ".VersionControl_RevNumber" at 4516.2,-3655.2 h70
  text "12773 W Forest Hill Blvd." at -448.8,-3735.2 h70
  text "Ste. #219" at -448.8,-3835.2 h70
  text "LAYER NAME:" at 851.2,-3835.2 h45
  text "DWG NO:" at 2351.2,-3835.2 h45
  text "SCALE:" at 4451.2,-3835.2 h45
  text "Wellington, FL  33414" at -448.8,-3935.2 h70
  text ".Layer_Name" at 901.2,-3955.2 h70
  text "DWG PART NUMBER" at 2421.2,-3955.2 h70
  text ".Print_Scale" at 4516.2,-3955.2 h70
  text "1" at -4147.46,-4170.2 h70
  text "2" at -1396.8,-4170.2 h70
  text "3" at 1348.2,-4170.2 h70
  text "4" at 4099.21,-4170.2 h70
Drill Drawing:
  lines w1: -96.41,1455.63 ccw(c-3.9,1456.13) 88.61,1455.63 ; -96.41,1455.72 -96.41,1526.49 cw(c-3.9,1525.99) 88.61,1526.49 ; 88.72,1455.63 88.72,1526.49
  lines w9: 2646.2,3191.2 5166.2,3191.2 ; 2646.2,3691.2 5166.2,3691.2 ; 2586.2,2624.8 2586.2,3979.8 5226.2,3979.8 5226.2,2624.8 2586.2,2624.8
  text "Mfg Notes for:" at 2610,3864.8 h60
  text ".Pcb_File_Name_No_Path" at 2610,3764.8 h60
  text "Stackup:" at 2610,3564.8 h60
  text "Top Layer (GTL) - 1oz" at 2610,3464.8 h60
  text "Bottom Layer (GBL) - 1oz" at 2610,3364.8 h60
  text "Board Thickness: .062in" at 2610,3264.8 h60
  text "Build Notes:" at 2610,3064.8 h60
  text "Material: FR-4 TG 140deg" at 2610,2964.8 h60
  text "Finish: Matte Green Soldermask" at 2610,2864.8 h60
  text "Lead: Lead free/RoHS" at 2610,2764.8 h60
  text "Silk screen: White" at 2610,2664.8 h60
  text "Slotted hole!?" at -924,1894 h60
  text "Board Diameter" at 2030,60 h60
  text ".Legend" at -5213.8,-3950.2 h60

## Dimensions
0,0 to 2100,100 on Drill Drawing
-3.9,1525.99 to -287.35,1809.44 on Drill Drawing
-3.9,1618.5 to -3.9,1363.61 on Drill Drawing
88.72,1455.63 to -96.41,1455.72 on Drill Drawing

## Text inside footprints (layer, text, board x,y; h text height)
B1: Top Overlay "-" at 1150,-420 h80; Top Overlay "+" at 1150,410 h80 r270
B2: Top Overlay "-" at 720,450 h80 r180; Top Overlay "+" at 660,-420 h80
B3: Top Overlay "-" at -720,-420 h80; Top Overlay "+" at -720,380 h80
B4: Top Overlay "-" at -1210,360 h80; Top Overlay "+" at -1210,-420 h80